# Altium PCB mppt-ng controlboard.PCBDOC
Units mm, origin at the board's own origin, x right, y up, seen from the top; angles counter-clockwise.
Board outline 53.45 x 100.2 mm, 2 copper layers (Top Layer, Bottom Layer); 131 components, 123 nets, 548 pads, 104 vias.
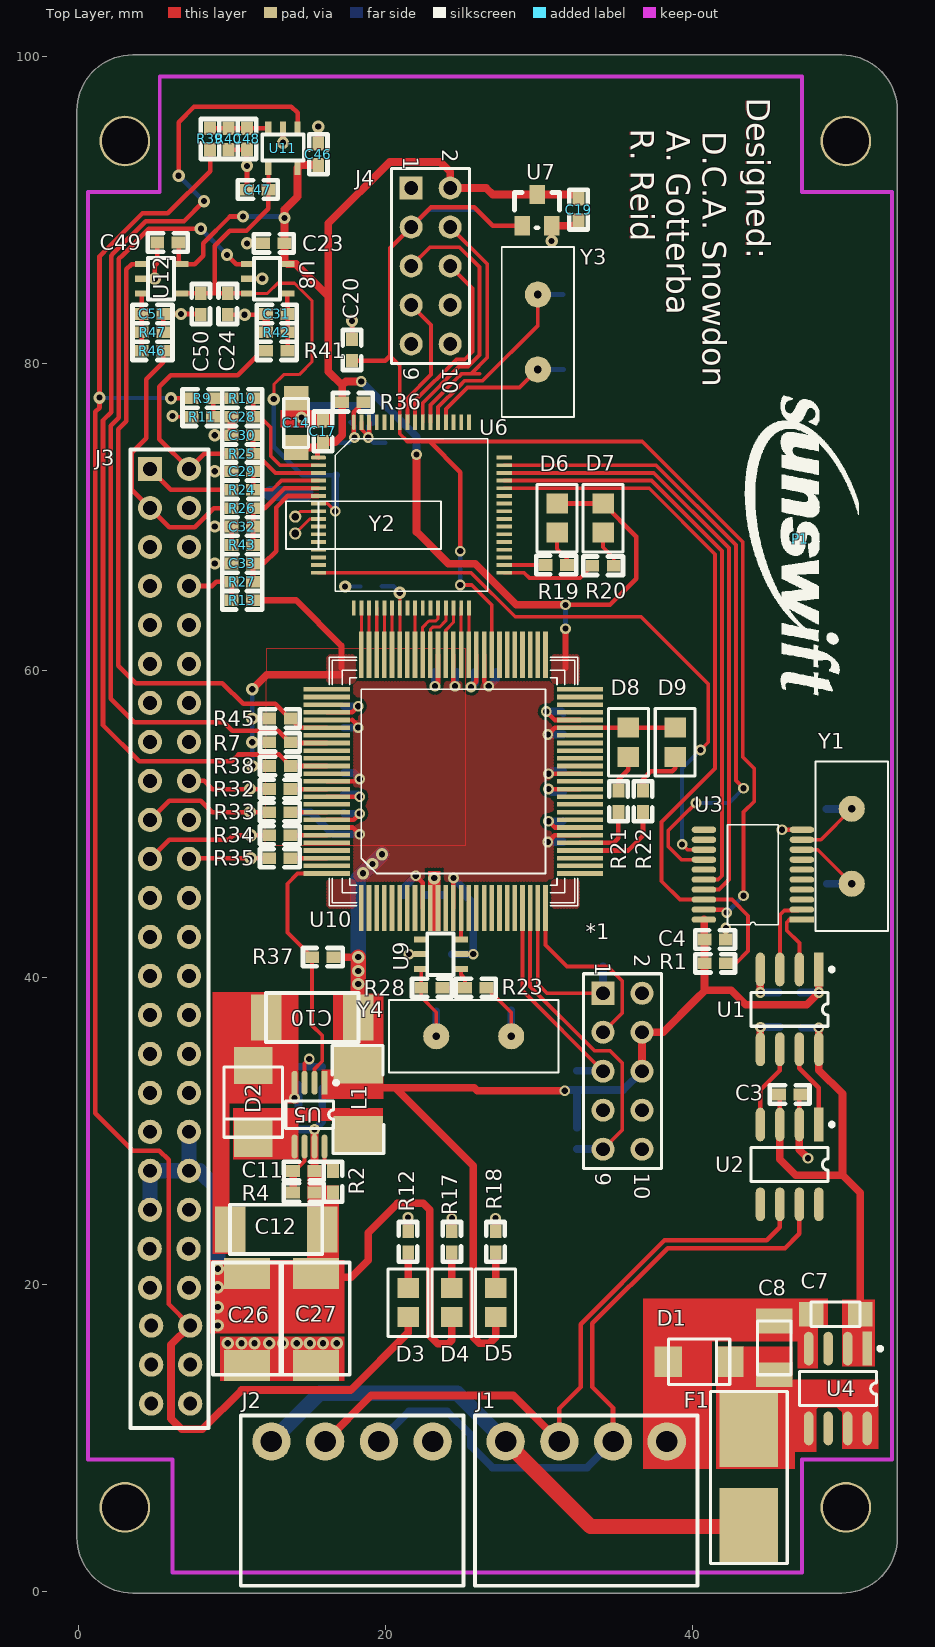
[diagram p0: Top Layer view]
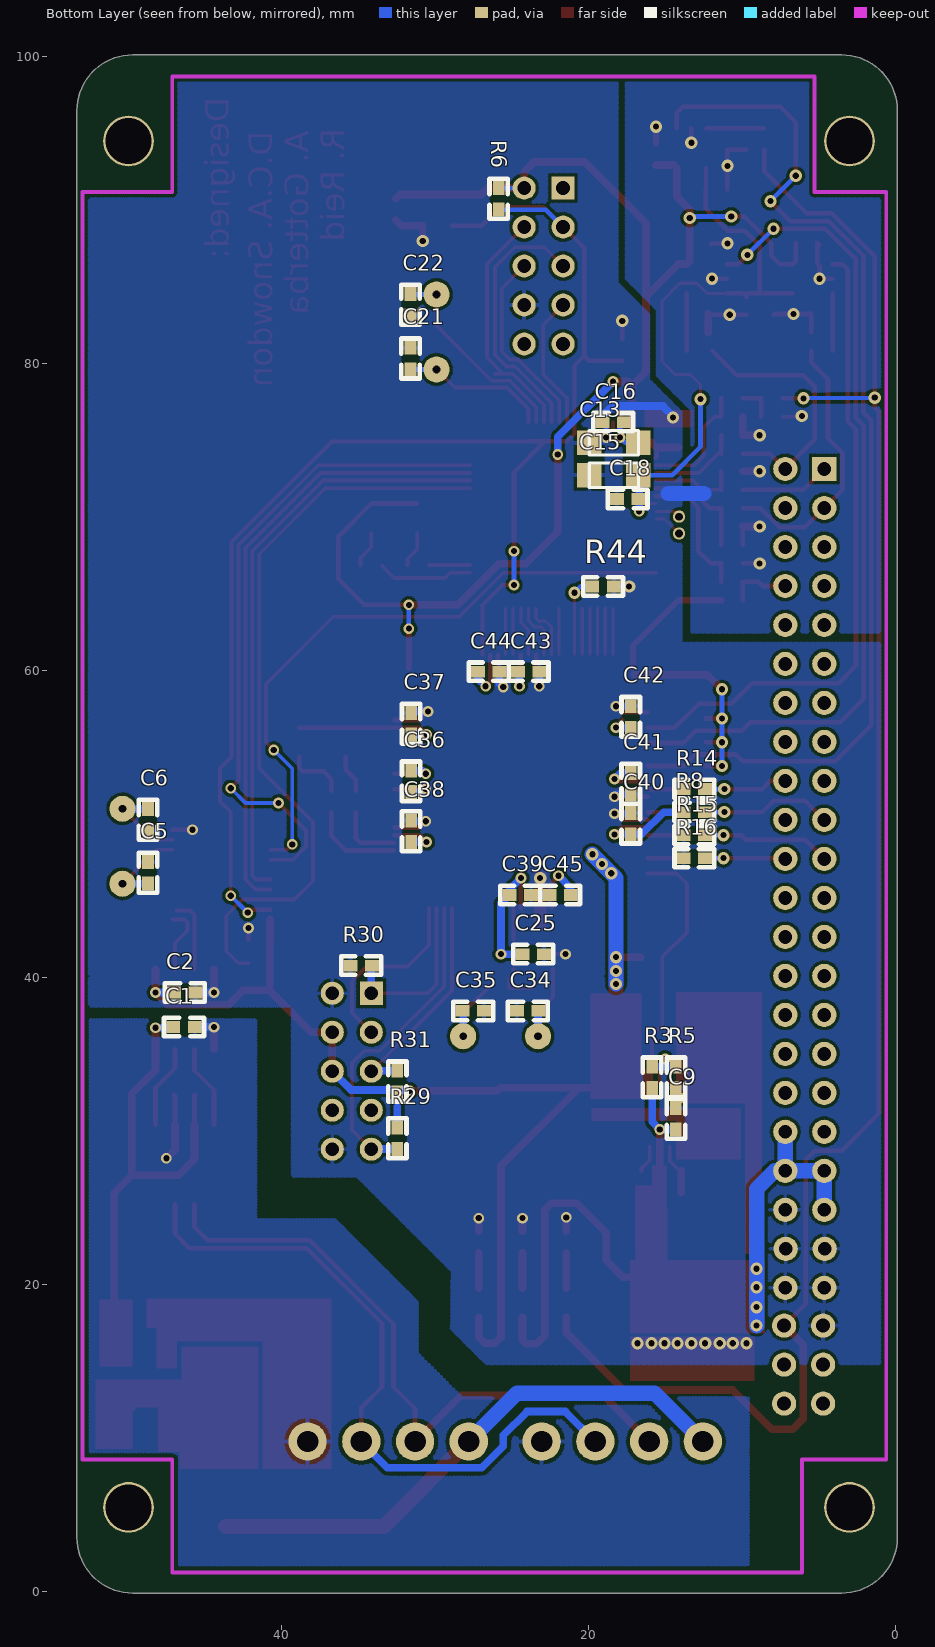
[diagram p1: Bottom Layer view, seen from below]

## Layer stack, top to bottom
Top Layer: signal copper 0.0356
Dielectric: dielectric 0.32, FR-4, Dk 4.8
Bottom Layer: signal copper 0.0356

## Board outline
3.5,-0.077 cw(c3.5,3.55) -0.127,3.55 -0.127,96.5 cw(c3.5,96.5) 3.5,100.127 49.7,100.127 cw(c49.7,96.5) 53.327,96.5 53.327,3.55 cw(c49.7,3.55) 49.7,-0.077

## Design rules (kind name [scope] priority, off if disabled: settings)
Clearance [All] p1: gap=0.2
ComponentClearance [All] p1: gap=0.254 collisioncheckmode=0
HoleSize [All] p1: absolutevalues=TRUE maxlimit=10 minlimit=0.3 maxpercent=80.000 minpercent=20.000
MinimumAnnularRing [All] p1: minimumring=0.15
PlaneClearance [All] p1: clearance=0.5
PlaneConnect [All] p1: planeconnectstyle=Relief reliefexpansion=0.5 reliefentries=4 reliefconductorwidth=0.25 reliefairgap=0.25
PolygonConnect [All] p1: connectstyle=Relief reliefconductorwidth=0.25 reliefentries=4 polygonreliefangle="90 Angle"
RoomDefinition U_3V3-CAN [InComponentClass('U_3V3-CAN')] p1: confinementstyle=ConfineIn formatcopy=TRUE outline 10.169,0.019 10.169,11.881 37.144,11.881 37.144,16.829 39.564,16.829 39.564,50.279 47.683,50.279 47.683,54.418 53.018,54.418 53.018,42.733 52.709,42.733 52.709,9.194 46.514,9.194 46.514,1.409 40.681,1.409 40.681,0.019
RoomDefinition U_MAXII [InComponentClass('U_MAXII')] p2: confinementstyle=ConfineIn formatcopy=TRUE outline 14.294,42.694 14.294,62.906 34.506,62.906 34.506,41.997 38.314,41.997 38.314,25.359 32.526,25.359 32.526,27.844 31.444,27.844 31.444,42.694
RoomDefinition U_3V3SwitchingRegulator [InComponentClass('U_3V3SwitchingRegulator')] p3: confinementstyle=ConfineIn formatcopy=TRUE outline 10.85,39.4 19.561,39.4 19.561,35.944 20.22,35.944 20.22,28.193 17.562,28.193 17.562,25.013 17.211,25.013 17.211,21.638 8.5,21.638 8.5,25.6 9.102,25.6 9.102,35.86 10.85,35.86
RoutingCorners [All] p1: cornerstyle=45-Degree minsetback=3 maxsetback=3
RoutingLayers [All] p1: top layer="Not Used" bottom layer="Not Used"
RoutingVias [All] p1: holewidth=0.4 width=0.8 viastyle="Through Hole" minholewidth=0.4 minwidth=0.7 maxholewidth=8 maxwidth=10
SolderMaskExpansion [All] p1: expansion=0.102
TestPointUsage [All] p1: valid=0 allowmultiple=FALSE
Testpoint [All] p1: side=15 testpointundercomponent=TRUE minsize=1.016 maxsize=2.54 preferedsize=1.524 minholesize=0 maxholesize=1.016 preferedholesize=0.813 testpointgrid=0.025 style=1023 order=-539222988
Width [All] p1: maxlimit=5 minlimit=0.2 preferedwidth=0.254 toplayer_prefwidth=0.4 bottomlayer_prefwidth=1 minimp=50.000000 maximp=50.000000 favimp=50.000000
12 further rules are at their usual default settings.

## Classes and differential pairs
component class TopLevel: C23 C24 C25 C26 C27 C28 C29 C30 C31 C32 C33 C34 C35 C46 C47 C48 C49 C50 C51 D3 D4 D5 D6 D7 D8 D9 J3 J7 P1 R7 R8 R9 R10 R11 R12 R13 R14 R15 R16 R17 R18 R19 R20 R21 R22 R23 R24 R25 R26 R27 R28 R32 R33 R34 R35 R37 R38 R39 R40 R41 R42 R43 R44 R45 R46 R47 U8 U9 U11 U12 Y4
component class MSP430F149: C13 C14 C15 C16 C17 C18 C19 C20 C21 C22 J4 J6 R6 R36 U6 U7 Y2 Y3
component class U_3V3-CAN: C1 C2 C3 C4 C5 C6 C7 C8 D1 F1 J1 J2 R1 U1 U2 U3 U4 Y1
component class U_3V3SwitchingRegulator: C9 C10 C11 C12 D2 L1 R2 R3 R4 R5 U5
component class U_MAXII: *1 C36 C37 C38 C39 C40 C41 C42 C43 C44 C45 R29 R30 R31 U10

## Components (designator, comment, footprint, x,y, rotation, side; value= is the part's Value field where it differs from the comment)
*1 "JTAGHEADER" HDR2X5 34.15,39 r270 top
C1 "100n" 0603 45.65,36.8 r0 bottom
C2 "100n" 0603 45.6,39.05 r0 bottom
C3 "100n" 0603 47,32.4 r180 top
C4 "100n" 0603 40.75,42.5 r0 top
C5 "27p" 0603 48.7,47.55 r270 bottom
C6 "27p" 0603 48.7,49.6 r90 bottom
C7 "2.2u" MCCT-CASEA 49.3,18.1 r0 top
C8 "10u" MCCT-CASEB 45.3,14.15 r90 top
C9 "100n" 0603 14.306,30.119 r90 bottom
C10 "22u 6.3V" MCCT-CASEC 18.206,37.419 r180 top
C11 "1n" 0603 15.356,27.419 r180 top
C12 "22u 16V" MCCT-CASEC 15.856,23.619 r180 top
C13 "CAP POL3" MCCT-CASEA 18.35,74.85 r0 bottom
C14 "CAP POL3" MCCT-CASEA 14.15,76.15 r90 top
C15 "CAP POL3" MCCT-CASEA 18.35,72.75 r0 bottom
C16 "100nF" 0603 17.7,76.2 r0 bottom
C17 "100nF" 0603 15.9,74.9 r90 top
C18 "100nF" 0603 16.75,71.2 r0 bottom
C19 "100nF" 0603 32.55,90.75 r270 top
C20 "10nF" 0603 17.8,80.2 r90 top
C21 "18pF" 0603 31.6,79.65 r90 bottom
C22 "18pF" 0603 31.6,84.55 r270 bottom
C23 "100n" 0603 13.4,87.85 r180 top
C24 "100n" 0603 9.7,84.6 r270 top
C25 "100n" 0603 24.3,41.55 r180 bottom
C26 "CAP POL3" MCCT-CASED 10.95,20.75 r270 top
C27 "CAP POL3" MCCT-CASED 15.45,20.75 r270 top
C28 "1n5" 0603 9.95,76.55 r0 top
C29 "" 0603 9.95,73 r0 top
C30 "" 0603 9.95,75.35 r0 top
C31 "1n" 0603 13.6,83.25 r180 top
C32 "10n" 0603 9.95,69.4 r0 top
C33 "10n" 0603 9.95,67 r0 top
C34 "30pF" 0603 23.25,37.85 r0 bottom
C35 "30pF" 0603 28.2,37.85 r180 bottom
C36 "100nF" 0603 31.55,53.5 r270 bottom
C37 "100nF" 0603 31.55,55.85 r90 bottom
C38 "100nF" 0603 31.55,48.85 r90 bottom
C39 "100nF" 0603 25.15,45.4 r180 bottom
C40 "100nF" 0603 17.25,49.35 r90 bottom
C41 "100nF" 0603 17.25,53.35 r270 bottom
C42 "100nF" 0603 17.25,56.3 r90 bottom
C43 "100nF" 0603 24.6,59.95 r180 bottom
C44 "100nF" 0603 27.2,59.95 r180 bottom
C45 "100nF" 0603 21.15,45.4 r0 bottom
C46 "100n" 0603 15.6,92.95 r90 top
C47 "100n" 0603 12.35,91.35 r180 top
C48 "?nF" 0603 10.95,95.35 r270 top
C49 "100n" 0603 6.5,87.9 r180 top
C50 "100n" 0603 7.95,84.6 r270 top
C51 "?nF" 0603 4.1,83.25 r0 top
D1 "5V Transient Supressor" SMA 40.4,15 r0 top
D2 "MBRS130" SMB 11.356,31.919 r270 top
D3 "LED" 0805LED 21.45,17.9 r90 top
D4 "LED" 0805LED 24.3,17.9 r90 top
D5 "LED" 0805LED 27.15,17.9 r90 top
D6 "LED" 0805LED 31.15,70.9 r270 top
D7 "LED" 0805LED 34.15,70.9 r270 top
D8 "LED" 0805LED 35.8,56.3 r270 top
D9 "LED" 0805LED 38.85,56.3 r270 top
F1 "125mA/3A" LITTELFUSE-154 43.65,7.45 r90 top
J1 "CON4" WEIDMULLER-SL3.5/4/90G 27.8,9.8 r0 top
J2 "CON4" WEIDMULLER-SL3.5/4/90G 12.55,9.8 r0 top
J3 "MPPT_NG" BL12/50M 4.64,73.152 r0 top
J4 "Tritium JTAG Connector" HDR2X5 21.65,91.45 r270 top
L1 "330u" 1812 18.206,29.819 r90 top
P1 "SUN_LOGO" SUNSWIFTLOGO 47,68.6 r270 top
R1 "10k" 0603 42.15,40.95 r180 top
R2 "100k" 0603 16.556,27.419 r270 top
R3 "120k" 0603 15.856,32.819 r90 bottom
R4 "1R 1%" 0603 15.356,26.019 r180 top
R5 "47k" 0603 14.306,32.819 r90 bottom
R6 "10k" 0603 25.85,90.05 r90 bottom
R7 "10k" 0603 13.8,55.35 r180 top
R8 "10k" 0603 12.4,50.8 r0 bottom
R9 "1M5 1%" 0603 8.75,77.75 r180 top
R10 "22k" 0603 11.35,77.75 r180 top
R11 "220k 1%" 0603 7.35,76.55 r0 top
R12 "3k3" 0603 21.45,23.5 r270 top
R13 "3k3" 0603 9.95,64.6 r0 top
R14 "3k3" 0603 13.797,52.3 r180 bottom
R15 "3k3" 0603 13.797,49.3 r180 bottom
R16 "3k3" 0603 13.797,47.8 r180 bottom
R17 "1k0" 0603 24.3,23.5 r270 top
R18 "1k0" 0603 27.15,23.5 r270 top
R19 "1k0" 0603 30.4,66.9 r0 top
R20 "1k0" 0603 33.45,66.85 r0 top
R21 "1k0" 0603 35.15,50.8 r90 top
R22 "1k0" 0603 36.75,50.8 r90 top
R23 "1k0" 0603 26.55,39.35 r180 top
R24 "8k2" 0603 11.35,71.8 r180 top
R25 "4k7" 0603 9.95,74.15 r0 top
R26 "33k" 0603 11.35,70.6 r180 top
R27 "33k" 0603 11.35,65.8 r180 top
R28 "2,2M" 0603 23.7,39.35 r180 top
R29 "10k" 0603 32.45,28.85 r90 bottom
R30 "10k" 0603 35.5,40.8 r180 bottom
R31 "10k" 0603 32.45,33.95 r270 bottom
R32 "100R" 0603 12.4,52.3 r0 top
R33 "100R" 0603 12.4,50.8 r0 top
R34 "100R" 0603 12.4,49.3 r0 top
R35 "100R" 0603 12.4,47.8 r0 top
R36 "100R" 0603 18.55,77.5 r180 top
R37 "10k" 0603 15.2,41.35 r0 top
R38 "10k" 0603 13.8,53.8 r180 top
R39 "1M 1%" 0603 8.55,95.35 r270 top
R40 "330k 1%" 0603 9.75,93.95 r90 top
R41 "10k" 0603 12.2,80.85 r0 top
R42 "150k" 0603 12.2,82.05 r0 top
R43 "33k" 0603 11.35,68.2 r180 top
R44 "10k" 0603 19.75,65.5 r180 bottom
R45 "10k" 0603 13.8,56.9 r180 top
R46 "" 0603 4.1,80.85 r0 top
R47 "" 0603 5.5,82.05 r180 top
U1 "IL712" SO8 46.3,37.95 r180 top
U2 "SN65HVD232" SO8 46.3,27.85 r180 top
U3 "MCP2515X/ST" TSSOP20 47.1,43.8 r180 top
U4 "MIC5200" SO8 49.45,13.25 r180 top
U5 "LTC1474" TSOP8 16.006,33.169 r270 top
U6 "MSP430F149" QFP64 15.6,73.9 r0 top
U7 "XC61CN2702MR" SOT23-3 28.894,88.999 r0 top
U8 "LMV7235M5" SOT23-5 11,86.501 r270 top
U9 "SN74LVC1GX04" SOT23-6 22.3,42.5 r270 top
U10 "EPM570T100C4" TQFP100 18.4,45.05 r90 top
U11 "LMV7235M5" SOT23-5 14.25,95.35 r180 top
U12 "LMV7235M5" SOT23-5 4.1,86.5 r270 top
Y1 "16MHz" HC49/4H 50.35,43.05 r90 top
Y2 "32.768 KHz" WATCHA 14.1,70.05 r270 top
Y3 "7.3728 MHz" HC49/4H 29.9,87.6 r270 top
Y4 ">40 MHz" HC49/4H 31.25,36.2 r180 top

## Footprints (in the part's own frame and the unit in brackets; to place one, negate y for a bottom-side part, rotate by r counter-clockwise, add the part's x,y. Pads: shape width x height; smd on the part's side, far side on the other; paste and mask are expansions set on the pad)
0603 [mil]
  rect 35.43x30 smd: 1(0,0) 2(55,0)
  silkscreen extent -24,-24 79,24
0805LED [mm]
  rect 1.3x1.4 smd: A(0,0) K(1.9,0)
  silkscreen extent -1.25,-1.3 3.15,1.3
1812 [mm]
  rect 2.4x3.2 smd: 1(0,0) 2(4.5,0)
  silkscreen extent -1.27,-1.66 5.77,1.7
BL12/50M [mil]
  rect 62x62 hole 35.43: 1(0,0)
  round 62 hole 35.43: 2(100,0) 3(0,-100) 4(100,-100) 5(0,-200) 6(100,-200) 7(0,-300) 8(100,-300) 9(0,-400) 10(100,-400) 11(0,-500) 12(100,-500) 13(0,-600) 14(100,-600) 15(0,-700) 16(100,-700) 17(0,-800) 18(100,-800) 19(0,-900) 20(100,-900) 21(0,-1000) 22(100,-1000) 23(0,-1100) 24(100,-1100) 25(0,-1200) 26(100,-1200) 27(0,-1300) 28(100,-1300) 29(0,-1400) 30(100,-1400) 31(0,-1500) 32(100,-1500) 33(0,-1600) 34(100,-1600) 35(0,-1700) 36(100,-1700) 37(0,-1800) 38(100,-1800) 39(0,-1900) 40(100,-1900) 41(-1,-2000) 42(99,-2000) 43(0,-2100) 44(100,-2100) 45(3,-2197) 46(103,-2197) 47(3,-2297) 48(103,-2297) 49(3,-2397) 50(103,-2397)
  silkscreen extent -50,-2460 150,50
HC49/4H [mm]
  round 1.7 hole 0.5: 1(3.085,0) 2(7.965,0)
  silkscreen extent 0,-2.35 11.05,2.35
HDR2X5 [mm] "Connector; Header; 5x2 Position"
  rect 1.5x1.5 hole 0.9: 1(0,0)
  round 1.5 hole 0.9: 2(0,2.54) 3(2.54,0) 4(2.54,2.54) 5(5.08,0) 6(5.08,2.54) 7(7.62,0) 8(7.62,2.54) 9(10.16,0) 10(10.16,2.54)
  silkscreen extent -1.27,-1.27 11.43,3.81
LITTELFUSE-154 [mm]
  rect 5x3.81 smd: 1(-3.185,0) 2(3.185,0)
  silkscreen extent -5.6,-2.51 5.6,2.5
MCCT-CASEA [mm]
  rect 1.6x1.6 smd: 1(-1.6,0) 2(1.6,0)
  silkscreen extent -1.6,-0.8 1.6,0.8
MCCT-CASEB [mm]
  rect 1.6x2.4 smd: 1(0,0) 2(3.5,0)
  silkscreen extent 0,-1.1 3.5,1.1
MCCT-CASEC [mm]
  rect 2x3 smd: 1(0,0) 2(6,0)
  silkscreen extent 0,-1.6 6,1.6
MCCT-CASED [mm]
  rect 2x3 smd: 1(0,0) 2(6,0)
  silkscreen extent -0.7,-2.2 6.6,2.2
QFP64 [mm]
  oval 1x0.25 smd: 1(0.008,-0.005)
  rect 1x0.25 smd: 2(0.008,-0.505) 3(0.008,-1.005) 4(0.008,-1.505) 5(0.008,-2.005) 6(0.008,-2.505) 7(0.008,-3.005) 8(0.008,-3.505) 9(0.008,-4.005) 10(0.008,-4.505) 11(0.008,-5.005) 12(0.008,-5.505) 13(0.008,-6.005) 14(0.008,-6.505) 15(0.008,-7.005) 16(0.008,-7.505) 33(12.108,-7.505) 34(12.108,-7.005) 35(12.108,-6.505) 36(12.108,-6.005) 37(12.108,-5.505) 38(12.108,-5.005) 39(12.108,-4.505) 40(12.108,-4.005) 41(12.108,-3.505) 42(12.108,-3.005) 43(12.108,-2.505) 44(12.108,-2.005) 45(12.108,-1.505) 46(12.108,-1.005) 47(12.108,-0.505) 48(12.108,-0.005)
  rect 0.25x1 smd: 17(2.308,-9.805) 18(2.808,-9.805) 19(3.308,-9.805) 20(3.808,-9.805) 21(4.308,-9.805) 22(4.808,-9.805) 23(5.308,-9.805) 24(5.808,-9.805) 25(6.308,-9.805) 26(6.808,-9.805) 27(7.308,-9.805) 28(7.808,-9.805) 29(8.308,-9.805) 30(8.808,-9.805) 31(9.308,-9.805) 32(9.808,-9.805) 49(9.808,2.295) 50(9.308,2.295) 51(8.808,2.295) 52(8.308,2.295) 53(7.808,2.295) 54(7.308,2.295) 55(6.808,2.295) 56(6.308,2.295) 57(5.808,2.295) 58(5.308,2.295) 59(4.808,2.295) 60(4.308,2.295) 61(3.808,2.295) 62(3.308,2.295) 63(2.808,2.295)
  oval 0.25x1 smd: 64(2.308,2.295)
  silkscreen extent 1.09,-8.72 11.02,1.21
SMA [mm]
  rect 1.8x2 smd: A(-2,0) K(2,0)
  silkscreen extent -2,-1.48 2,1.48
SMB [mm]
  rect 2.4x2.5 smd: A(-2.385,0) K(2.385,0)
  silkscreen extent -2.28,-1.9 2.3,1.9
SO8 [mm]
  rect 0.6x2.2 smd: 1(-1.905,-2.6)
  oval 0.6x2.2 smd: 2(-0.635,-2.6) 3(0.635,-2.6) 4(1.905,-2.6) 5(1.905,2.6) 6(0.635,2.6) 7(-0.635,2.6) 8(-1.905,2.6)
  silkscreen extent -2.88,-2.72 2.5,1.1
SOT23-3 [mm]
  rect 1x1.25 smd: 1(0,0) 2(1.905,0) 3(0.965,2.032)
  silkscreen extent -0.51,-0.13 2.41,2.16
SOT23-5 [mm]
  rect 0.4x0.9 smd: 1(0,0) 2(0.953,0) 3(1.91,0) 4(1.91,2.59) 5(0,2.59)
  silkscreen extent -0.4,0.4 2.3,2.1
SOT23-6 [mm]
  rect 0.4x0.9 smd: 1(0,0) 2(0.953,0) 3(1.91,0) 4(1.91,2.59) 5(0.953,2.59) 6(0,2.59)
  silkscreen extent -0.4,0.4 2.3,2.1
SUNSWIFTLOGO [mm] "Sunswift Logo"
  silkscreen extent -9.32,-3.58 10.19,3.81
TQFP100 [mm]
  rect 3x0.3 smd: 1(-0.5,0) 2(-0.5,-0.5) 3(-0.5,-1) 4(-0.5,-1.5) 5(-0.5,-2) 6(-0.5,-2.5) 7(-0.5,-3) 8(-0.5,-3.5) 9(-0.5,-4) 10(-0.5,-4.5) 11(-0.5,-5) 12(-0.5,-5.5) 13(-0.5,-6) 14(-0.5,-6.5) 15(-0.5,-7) 16(-0.5,-7.5) 17(-0.5,-8) 18(-0.5,-8.5) 19(-0.5,-9) 20(-0.5,-9.5) 21(-0.5,-10) 22(-0.5,-10.5) 23(-0.5,-11) 24(-0.5,-11.5) 25(-0.5,-12) 51(16,-12) 52(16,-11.5) 53(16,-11) 54(16,-10.5) 55(16,-10) 56(16,-9.5) 57(16,-9) 58(16,-8.5) 59(16,-8) 60(16,-7.5) 61(16,-7) 62(16,-6.5) 63(16,-6) 64(16,-5.5) 65(16,-5) 66(16,-4.5) 67(16,-4) 68(16,-3.5) 69(16,-3) 70(16,-2.5) 71(16,-2) 72(16,-1.5) 73(16,-1) 74(16,-0.5) 75(16,0)
  rect 0.3x3 smd: 26(1.75,-14.25) 27(2.25,-14.25) 28(2.75,-14.25) 29(3.25,-14.25) 30(3.75,-14.25) 31(4.25,-14.25) 32(4.75,-14.25) 33(5.25,-14.25) 34(5.75,-14.25) 35(6.25,-14.25) 36(6.75,-14.25) 37(7.25,-14.25) 38(7.75,-14.25) 39(8.25,-14.25) 40(8.75,-14.25) 41(9.25,-14.25) 42(9.75,-14.25) 43(10.25,-14.25) 44(10.75,-14.25) 45(11.25,-14.25) 46(11.75,-14.25) 47(12.25,-14.25) 48(12.75,-14.25) 49(13.25,-14.25) 50(13.75,-14.25) 76(13.75,2.25) 77(13.25,2.25) 78(12.75,2.25) 79(12.25,2.25) 80(11.75,2.25) 81(11.25,2.25) 82(10.75,2.25) 83(10.25,2.25) 84(9.75,2.25) 85(9.25,2.25) 86(8.75,2.25) 87(8.25,2.25) 88(7.75,2.25) 89(7.25,2.25) 90(6.75,2.25) 91(6.25,2.25) 92(5.75,2.25) 93(5.25,2.25) 94(4.75,2.25) 95(4.25,2.25) 96(3.75,2.25) 97(3.25,2.25) 98(2.75,2.25) 99(2.25,2.25) 100(1.75,2.25)
  silkscreen extent -0.35,-14.1 15.85,2.1
TSOP8 [mm]
  rect 1.55x0.4 smd: 1(0,0)
  oval 1.55x0.4 smd: 2(0,-0.65) 3(0,-1.3) 4(0,-1.95) 5(4.15,-1.95) 6(4.15,-1.3) 7(4.15,-0.65) 8(4.15,0)
  silkscreen extent -0.12,-2.52 2.98,0.88
TSSOP20 [mm]
  rect 1.6x0.4 smd: 1(0,0)
  oval 1.6x0.4 smd: 2(0,-0.65) 3(0,-1.3) 4(0,-1.95) 5(0,-2.6) 6(0,-3.25) 7(0,-3.9) 8(0,-4.55) 9(0,-5.2) 10(0,-5.85) 11(6.38,-5.85) 12(6.38,-5.2) 13(6.38,-4.55) 14(6.38,-3.9) 15(6.38,-3.25) 16(6.38,-2.6) 17(6.38,-1.95) 18(6.38,-1.3) 19(6.38,-0.65) 20(6.38,0)
  silkscreen extent 1.53,-6.18 4.85,0.33
WATCHA [mm]
  round 0.8 hole 0.5: 1(0,0) 2(1.1,0)
  silkscreen extent -1,-0.6 2.1,9.5
WEIDMULLER-SL3.5/4/90G [mm]
  round 2.5 hole 1.4: 1(0,0) 2(3.5,0) 3(7,0) 4(10.5,0)
  silkscreen extent -2,-9.4 12.5,1.7

## Part data
C1 C2 C3 C4 C5 C6 C7 C8 C9 C11 C16 C17 C18 C19 C20 C21 C22 C23 C24 C25 C28 C29 C30 C31 C32 C33 C34 C35 C36 C37 C38 C39 C40 C41 C42 C43 C44 C45 C46 C47 C48 C49 C50 C51: library part CAP, "Capacitor"
C10 C12: library part "Cap Pol3", "Polarized Capacitor (Surface Mount)"
C13 C14 C15 C26 C27: "Polarized Capacitor (Surface Mount)"
D1: library part DIODE, "Diode"
D2: library part "D SCHOTTKY", "Schottky Diode"
F1: library part FUSE2, "Fuse"
J1 J2: "Connector"
J3: "Biel Control Board Interconnector"
J4: library part 430F_JTAG_TRITIUM, "Tritium JTAG interface for MSP430"
L1: library part Inductor, "Inductor"
R1: library part RES1
R2 R4 R5 R6 R7 R8 R10 R11 R12 R13 R14 R15 R16 R17 R18 R19 R20 R21 R22 R23 R24 R25 R26 R27 R28 R29 R30 R31 R32 R33 R34 R35 R36 R37 R38 R40 R41 R42 R43 R44 R45 R47: library part RES1, "Resistor"
R3 R9 R39 R46: library part Res1, "Resistor"
U1: "IL712 Optoisolator - www.nve.com"
U2: "3.3V CAN Transciever"
U3: "MCP2510 CAN Controller"
U4: "MIC5200 - SO8"
U5: "Step-down converter, LTC1474CMS8-3.3"
U6: library part MSP430F14X
U7: library part XC61F, "SOT23 reset generator"
U8 U11 U12: library part LMV7235, "Low Power Comparator, Open-Drain Output"
U9: "Crystal oscillator driver"
U10: "MAX II 2.5/3.3V FPGA, 76 I/Os, 100-Pin Plastic TQFP, Commercial Temperature, Speed Grade 4"
Y1 Y2 Y3 Y4: library part CRYSTAL, "Crystal"

## Free pads (board coordinates)
  round 3.3 hole 3: 0(2.997,94.513) 1(2.997,5.512) 2(49.962,5.512) 3(49.962,94.513)

## Via types
v1: diameter 0.8, hole 0.4, Top Layer to Bottom Layer, 55 vias
v2: diameter 0.7, hole 0.4, Top Layer to Bottom Layer, 49 vias

## Nets (pads, with @x,y where several pads share a name; then routed paths per layer and width w, separated by ;. In a path a pad name is that pad's centre, name@x,y a point inside that pad or via, vN(x,y) a via of type N, cw(c..) or ccw(c..) an arc to the next point about the centre after c; other vN are vias at no path point)
3V3: *1.4 *1.6 C2.2 C4.1 C10.1 C14.1 C17.1 C19.1 C23.1 C25.1 C36.1 C37.1 C38.1 C39.1 C40.1 C41.1 C42.1 C43.1 C44.1 C45.1 C46.1 C49.1 D5.A D6.A D7.A D8.A D9.A J4.2 L1.2 R1.2 R6.2 R7.2 R8.2 R13.2 R29.2 R31.2 R36.2 R37.2 R38.2 R45.2 U1.1 U3.20 U5.1 U6.1 U7.3 U8.5 U9.5 U10.9 U10.13 U10.31 U10.39 U10.45 U10.59 U10.63 U10.80 U10.88 U10.94 U11.5 U12.5 | length 255.6
  Top Layer w0.25: J4.2 J4.2@24.193,91.45 ; U9.5 v2(25.697,41.547)
  Top Layer w0.3: C49.1 6.5,86.69 U12.5 7.55,86.5 8.1,87.05 8.1,87.85 9.85,89.6 v1(10.7,89.6) ; v1(11.3,53.8) R38.2 ; v1(11.3,55.35) R7.2@12.353,55.35 ; v1(11.3,56.9) R45.2@12.353,56.9 ; R13.2@11.3,64.553 R13.2 ; v1@13.4,89.3 v1(13.4,89.5) ; C17.1@15.55,74.55 15.55,73.953 U6.1 ; U10.94 17.85,49.8 v2(18.3,49.35) ; U10.88 18.3,52.8 v2(18.3,52.95) ; 17.8,56.8 18.2,56.4 v2(18.2,56.3) ; v2(21.95,46.65) 22.4,46.2 U10.9 ; U10.13 v2(24.4,46.5) ; U10.63 24.4,59.1 v2(24.5,59) ; U10.59 26.4,59.3 v2(26.7,59) ; v2(30.55,48.85) 31,49.3 U10.31 ; v2@30.55,53.3 U10.39 ; v2(30.55,55.85) 31,56.3 U10.45 D9.A ; D6.A D7.A 36.3,68.75 36.3,66 34.6,64.3 v2(31.7,64.3)
  Top Layer w0.4: R13.2 14.15,64.6 17.1,61.65 17.1,60.2 ; 31.7,60.2 v2(31.7,62.75)
  Top Layer w0.5: v1(11.3,58.8) 12.25,59.75 17,59.75 ; v1@13.4,89.3 13.4,86.69 U8.5 14.149,86.501 16.25,84.4 ; v1(13.4,89.5) 13.4,90.05 14.25,90.9 U11.5 14.44,92.95 C46.1 ; C14.1 15.55,74.55 C17.1 16.7,74.9 17.153,75.353 17.153,78.6 ; R37.2 v1(18.206,41.35) ; 18.2,32.85 25.75,32.85 25.95,32.65 v2(31.65,32.65) ; v2(18.4,78.85) 17.403,78.85 17.153,78.6 ; 20.6,32.85 25.7,27.75 25.7,16.6 26.1,16.2 26.75,16.2 27.15,16.6 D5.A ; v2(22,74.1) 22,69.05 24.08,66.97 25.83,66.97 28.5,64.3 v2(31.7,64.3) ; C19.1 32.269,91.031 26.969,91.031 26.55,91.45 J4.2 24.19,92.51 23.55,93.15 20.25,93.15 16.25,89.15 16.25,79.503 17.153,78.6 ; *1.6 *1.4 38.06,36.46 40.193,38.593 40.8,39.2 42.5,39.2 43.45,38.25 47.41,38.25 v2(48.205,39.045) ; U3.20 40.75,43.77 C4.1 40.753,42.497 R1.2 40.753,39.2 ; v2@48.205,38.995 U1.1
  Top Layer w1: C10.1 v1(18.206,41.35)
  Bottom Layer w0.3: v1(10.7,89.6) 13.3,89.6 v1(13.4,89.5) ; v1(11.3,53.8) v1(11.3,58.8) ; J4.2@24.193,91.45 R6.2@25.847,91.45 ; v2(31.7,62.75) v2(31.7,64.3)
  Bottom Layer w0.5: R8.2 15.1,50.8 16.55,49.35 C40.1 v2(18.3,49.35) ; C41.1 17.9,53.35 v2(18.3,52.95) ; C42.1 v2(18.2,56.3) ; v2(18.4,78.85) 22,75.25 v2(22,74.1) ; C45.1 21.15,45.85 v2(21.95,46.65) ; C25.1 25.694,41.55 v2(25.697,41.547) 25.697,44.853 C39.1 25.15,45.75 v2(24.4,46.5) ; v2(24.5,59) 24.5,59.85 C43.1 ; v2(26.7,59) 27.2,59.5 C44.1 ; v2(30.55,48.85) C38.1 ; v2(30.55,55.85) C37.1 ; v2(30.6,53.3) 30.8,53.5 C36.1 ; v2@31.7,32.7 35.47,32.7 *1.6 ; R29.2 R31.2 R31.2@32.597,32.7 ; C2.2@47.002,39.045 v2(48.205,39.045)
  Bottom Layer w1: v1(18.206,39.6) 18.206,46.506 v1(18.518,46.818) v1(19.12,47.42) v1(19.75,48.05)
  other v1: 18.206,40.45
5V: C9.1 C11.1 C12.1 C26.1 C27.1 D4.A J3.36 J3.37 J3.38 J3.39 R2.2 R3.1 R4.1 U5.7 | length 49.1
  Top Layer w0.5: C27.1@15.35,20.5 17.75,20.5 18.85,21.6 18.85,23.4 20.764,25.314 22.436,25.314 22.85,24.9 22.85,16.7 23.378,16.172 24.072,16.172 24.3,16.4 D4.A ; R4.1 v2(15.356,30.119)
  Bottom Layer w0.5: C9.1 v2(15.356,30.119) 15.856,30.619 R3.1
  Bottom Layer w1: J3.39 J3.37 7.868,27.432 9.05,26.25 v1(9.05,17.35) ; J3.38 J3.36
  other v1: 9.05,18.55 9.05,19.85 9.05,21.05
15V: D3.A J3.46 R9.2 R39.2 | length 116
  Top Layer w0.3: v1(6,77.75) R9.2 ; J3.46 5.85,18.754 5.85,28.15 5.25,28.75 3.5,28.75 1.077,31.173 1.077,76.877 1.35,77.15 1.35,87 1.961,87.611 4.15,89.8 5.8,89.8 8.55,92.55 R39.2
  Top Layer w0.5: J3.46 6,16.092 6,11.3 6.7,10.6 8.05,10.6 10.6,13.15 17.7,13.15 21.45,16.9 D3.A
  Bottom Layer w0.3: v1@1.5,77.8 v1(6,77.75)
  other v1: 1.35,77.8
15V_MEAS: C28.2 R10.1 U6.2 | length 7.8
  Top Layer w0.25: C28.2 11.8,76.55 12.5,75.85 12.5,74 13.105,73.395 U6.2
  Top Layer w0.3: C28.2@11.35,76.553 R10.1
232RX: J3.27
232TX: J3.26
/REG_FS: R37.1 U5.2 U10.100 | length 17
  Top Layer w0.25: U5.2 15.356,34.069 15.856,34.569 15.856,36.25 15.2,36.906 R37.1 13.583,42.967 13.583,46.133 14.25,46.8 U10.100
/RESET: C20.1 J4.3 R6.1 U3.19 U6.58 U7.1 U10.58 | length 98
  Top Layer w0.25: 20.285,80.515 20.908,79.892 20.908,75.442 21.4,74.95 ; 23.75,74.95 36.7,74.95 43.25,68.4 43.25,54.4 44,53.65 44,51.5 43.3,50.8 v2(43.3,45.35) ; v2(24.85,65.6) 25.6,65.6 26.9,64.3 U10.58
  Top Layer w0.3: C20.1 19.97,80.2 20.285,80.515 20.285,87.545 22.94,90.2 25.75,90.2 26.951,88.999 U7.1 ; 21.4,74.95 23.75,74.95 ; 22.85,74.95 24.85,72.95 v2(24.85,67.8) ; U3.19 42,44.45 v2(42.2,44.25)
  Bottom Layer w0.3: J4.3 22.79,90.05 R6.1 ; v2(24.85,65.6) v2(24.85,67.8) ; v2(42.2,44.25) v2@43.35,45.4
ADC0: U6.59
ADC1: U6.60
ADC2: U6.61
ADC4: C30.2 R25.2 U6.3 | length 6
  Top Layer w0.25: R25.2 11.55,74.15 12.805,72.895 U6.3
  Top Layer w0.3: R25.2 C30.2
ADC5: C29.2 R24.1 U6.4 | length 5.7
  Top Layer w0.25: R24.1 12.6,71.8 13.195,72.395 U6.4
  Top Layer w0.3: R24.1 C29.2@11.35,72.997
ADC6: C32.2 R26.1 R43.1 U6.5 | length 7.2
  Top Layer w0.3: C32.2 11.347,68.203 R43.1 ; C32.2@11.35,69.403 R26.1 12.1,70.6 13.395,71.895 U6.5
ADC7: C33.2 R27.1 U6.6 | length 8.9
  Top Layer w0.3: R27.1 11.347,65.803 C33.2 12.05,67 12.85,67.8 12.85,70.643 13.602,71.395 U6.6
AGND: U6.11
AREF: U6.10
AUXSIGNAL: R35.2 U10.98 | length 2.4
  Top Layer w0.3: R35.2 U10.98
CAN_3V3: C1.2 C3.2 C7.2 U1.8 U2.3 U4.1 U4.2 | length 29.6
  Top Layer w0.3: C3.2 45.665,32.338 U2.3
  Top Layer w0.5: U2.3 45.665,28.185 46.7,27.15 49.75,27.15 ; v2(48.2,36.75) 48.205,36.745 48.205,33.995 49.75,32.45 49.75,27.15 ; C7.2 50.9,26 49.75,27.15
  Bottom Layer w0.5: C1.2@47.097,36.75 v2(48.2,36.75)
CAN_5V: C8.1 D1.K F1.2 U4.5 U4.7 U4.8 | length 10.3
  Top Layer w0.5: F1.2 47.53,10.635 47.53,11.73 48.1,12.3 49.45,12.3 50.085,11.665 U4.7 U4.8
CAN_CS: R1.1 U3.18 U6.44 | length 48.9
  Top Layer w0.25: U6.44 37.155,71.895 41.45,67.6 41.45,53.65 37.95,50.15 37.95,46.3 39.15,45.1 42.55,45.1 43.6,44.05 43.6,41.75 42.8,40.95 R1.1
CAN_GND: C1.1 C3.1 C7.1 C8.2 D1.A J1.4 J2.4 U1.5 U2.2 U4.4 | length 7.9
  Top Layer w0.3: U1.5 U1.5@44.395,36.195 ; U2.2 46.935,32.335 C3.1
  Top Layer w0.5: U1.5 44.395,36.795 v2(44.4,36.79) ; U2.2 46.935,28.815 v2(47.5,28.25)
  Bottom Layer w0.5: v2@44.41,36.8 C1.1
CAN_H: J1.3 J2.3 U2.7 | length 44.8
  Top Layer w0.3: J1.3 34.8,12 33.45,13.35 33.45,17.493 38.357,22.4 46,22.4 46.935,23.335 U2.7
  Bottom Layer w0.5: J2.3 21.5,11.75 24,11.75 25.55,10.2 25.55,9.5 26.95,8.1 33.1,8.1 J1.3
CAN_INT: U3.13 U6.16 | length 41.1
  Top Layer w0.25: U6.16 25.555,66.395 28.425,63.525 36.625,63.525 41,59.15 41,55.35 v2(40.5,54.85) ; v2(39.3,48.7) 39.65,48.35 U3.13
  Bottom Layer w0.25: v2(39.3,48.7) 39.3,53.65 v2(40.5,54.85)
CAN_L: J1.2 J2.2 U2.6 | length 43.3
  Top Layer w0.3: J1.2 31.3,11.95 32.7,13.35 32.7,17.45 38.15,22.9 44.8,22.9 45.665,23.765 U2.6
  Top Layer w0.5: J2.2 19.05,12.8 28.3,12.8 29.724,11.376 ; 29.55,11.55 29.724,11.376 ; J1.2 29.724,11.376
CAN_VCC: F1.1 J1.1 J2.1 | length 36
  Top Layer w1: J1.1 33.335,4.265 F1.1
  Bottom Layer w1: J2.1 15.7,12.95 24.65,12.95 J1.1
CLK: U9.6 U10.14 | length 2.1
  Top Layer w0.25: U9.6 24.89,44.54 U10.14
DIODESIGNAL: R32.2 U10.89 | length 2.4
  Top Layer w0.3: R32.2 U10.89
F\S\: U6.21 U10.72 | length 3
  Top Layer w0.2: U10.72@19.908,61.058 U6.21
FPGA_CS: U6.32 U10.61 | length 3
  Top Layer w0.2: U10.61@25.408,61.058 U6.32
FPGA_ENABLE: U6.25 U10.68 | length 3
  Top Layer w0.2: U10.68@21.908,61.058 U6.25
FPGA_RESET: R44.1 U6.23 U10.70 | length 5.4
  Top Layer w0.2: U10.70@20.908,61.058 v1(20.908,65.092)
  Bottom Layer w0.3: R44.1 20.5,65.5 v1(20.908,65.092)
FS_RESET: U6.22 U10.71 | length 3
  Top Layer w0.2: U10.71@20.408,61.058 U6.22
GND: *1.2 *1.10 C2.1 C4.2 C5.1 C6.1 C9.2 C10.2 C12.2 C13.2 C14.2 C15.2 C16.2 C17.2 C18.2 C19.2 C20.2 C21.2 C22.2 C23.2 C24.2 C25.2 C26.2 C27.2 C28.1 C29.1 C30.1 C31.2 C32.1 C33.1 C34.2 C35.2 C36.2 C37.2 C38.2 C39.2 C40.2 C41.2 C42.2 C43.2 C44.2 C45.2 C46.2 C47.2 C48.2 C49.2 C50.2 C51.2 D2.A J3.40 J3.41 J3.42 J3.43 J3.44 J3.45 J4.8 R5.1 R11.1 R12.1 R14.1 R15.1 R16.1 R17.1 R18.1 R30.1 R40.1 R42.1 R43.2 R44.2 R47.1 U1.4 U3.10 U5.4 U6.62 U6.63 U7.2 U8.2 U9.2 U10.10 U10.11 U10.32 U10.37 U10.46 U10.60 U10.65 U10.79 U10.90 U10.93 U11.2 U12.2 | length 83.4
  Top Layer w0.25: v1@6.1,76.55 R11.1 ; v1(10.95,87.85) C23.2 ; U6.63 18.408,75.742 18.85,75.3 v2(18.85,75.2) ; v2(21.503,41.547) U9.2
  Top Layer w0.3: U12.2 v1(4.953,85.547) 4.953,86.403 5.103,86.553 C49.2 C49.2@4.95,87.747 ; C51.2 7.903,83.25 C50.2 ; R47.1 C51.2@5.5,83.247 ; v1(8.85,67) C33.1 ; C24.2 10.797,83.203 v1(10.8,83.2) C31.2@11.903,83.2 ; R40.1@9.7,93.95 10.947,93.95 10.95,93.947 v1(10.95,92.9) ; C32.1 R43.2 ; C47.2 v1@10.953,92.897 ; U8.2@11,85.55 v1(11.953,85.55) v1@12.003,85.553 ; C23.2@12.003,87.8 C23.2 ; C31.2@12.153,83.2 C31.2 ; v1@13.297,94.4 U11.2 ; U10.93 17.9,50.3 v2(18.3,50.7) ; U10.90 v2(18.3,51.8) ; U10.79 17.8,57.3 v2(18.2,57.7) ; v1(17.8,82.8) C20.2@17.803,81.6 ; v2(18.85,75.2) 18.908,75.258 U6.62 ; v2(23.203,58.997) 23.4,59.194 U10.65 ; v2(25.55,58.95) 25.9,59.3 U10.60 ; v2(30.45,57.35) 31,56.8 U10.46 ; v2(30.6,50.2) 31,49.8 U10.32 ; v2(30.6,52.3) U10.37 ; C4.2 v2(42.147,43.253) ; U1.4@44.4,39.7 U1.4@44.4,40.545 ; v2(45.8,49.65) U3.10
  Top Layer w0.4: C46.2 v1(15.6,95.45) ; U7.2 30.799,88.001 v1(30.8,88.002)
  Top Layer w0.5: v1@8.75,69.4 C32.1 ; v1(8.85,73) C29.1 ; v1(8.85,75.35) C30.1 C28.1 ; R42.1@12.203,82.047 C31.2 ; v2(14.056,32.169) U5.4 ; R12.1 v2(21.45,24.4) ; R17.1 v2(24.3,24.35) ; R18.1 v2(27.15,24.35) ; U7.2 32.196,88.999 C19.2 ; v2(44.395,39.055) U1.4
  Bottom Layer w0.25: v1(17.35,65.5) R44.2
  Bottom Layer w0.3: C16.2 18.85,75.953 v2(18.85,75.2) 19.2,74.85 C13.2
  Bottom Layer w0.5: v2(14.056,32.169) v2@14.306,32.169 ; C9.2 R5.1@14.306,33.019 ; v1@14.45,76.55 15.15,77.25 18.45,77.25 19.097,76.603 C16.2 ; C40.2 17.297,50.7 v2(18.3,50.7) ; C41.2 18.147,51.953 v2(18.3,51.8) v2@18.25,51.75 ; C42.2 17.253,57.7 v2(18.2,57.7) ; C45.2 C39.2 ; v2(23.203,58.997) C43.2 ; v2(25.55,58.95) 25.803,59.203 C44.2 ; v2(30.45,57.35) 31.447,57.35 C37.2 ; v2(30.6,50.2) 31.503,50.2 C38.2 ; v2(30.6,52.3) 30.797,52.103 C36.2 ; v2@44.4,39.05 C2.1
  Bottom Layer w1: 12.5,71.55 14.8,71.55
  other v1: 9.7,16.2 10.6,16.2 11.45,16.2 12.4,16.2 13.3,16.2 14.2,16.2 15.05,16.2 15.9,16.2 16.8,16.2 23.15,46.5 8.85,69.4 14.5,76.5 6.1,76.6 6.65,83.25 13.3,94.4
GPIO1: U6.18 U10.75 | length 3
  Top Layer w0.2: U10.75@18.408,61.058 U6.18
GPIO2: U6.19 U10.74 | length 3
  Top Layer w0.2: U10.74@18.908,61.058 U6.19
GPIO3: U6.20 U10.73 | length 3
  Top Layer w0.2: U10.73@19.408,61.058 U6.20
IIN_MEAS_RAW: J3.3 R26.2 R46.2 | length 17.9
  Top Layer w0.3: R46.2 5.497,80.097 4.4,79 4.4,75.15 3.45,74.2 3.45,71.802 5.902,69.35 7.55,69.35 8.8,70.6 R26.2
MAINSIGNAL: R34.2 U10.95 | length 2.4
  Top Layer w0.3: R34.2 U10.95
N15VREGFAULT: R38.1 U10.86 U11.1 | length 69.5
  Top Layer w0.3: v1(6.5,92.25) 6.5,95.75 7.5,96.75 13.85,96.75 14.25,96.35 U11.1 ; v1(8.15,90.6) 6.85,89.3 4.357,89.3 2.25,87.193 2.1,87.043 2.1,76.85 1.577,76.327 1.577,56.45 3.927,54.1 9.95,54.1 10.4,54.55 13.05,54.55 R38.1 U10.86
  Bottom Layer w0.3: v1(6.5,92.25) v1(8.15,90.6)
NCURRENTFAULT: R45.1 U10.81 U12.1 | length 42.4
  Top Layer w0.3: U12.1 3.45,86.5 3.1,86.15 3.1,76.25 2.577,75.727 2.577,60.323 3.7,59.2 9.35,59.2 10.7,57.85 12.8,57.85 R45.1@13.75,56.9 ; R45.1 14.4,56.3 U10.81
Net*1_1: *1.1 R30.2 U10.24 | length 11.2
  Top Layer w0.25: U10.24 29.9,39.586 30.486,39 *1.1
  Bottom Layer w0.5: *1.1 R30.2@34.15,40.753
Net*1_3: *1.3 U10.25 | length 12.2
  Top Layer w0.25: U10.25 30.4,42.15 31.8,40.75 34.45,40.75 35.4,39.8 35.4,37.71 *1.3
Net*1_5: *1.5 R31.1 U10.22 | length 14.5
  Top Layer w0.25: U10.22 28.9,39.17 *1.5
  Bottom Layer w0.5: R31.1 *1.5@34.12,33.95
Net*1_9: *1.9 R29.1 U10.23 | length 21
  Top Layer w0.25: U10.23 29.4,39.45 33.6,35.25 34.6,35.25 35.4,34.45 35.4,30.09 *1.9
  Bottom Layer w0.5: R29.1 *1.9@34.14,28.85
NetC5_2: C5.2 U3.8 Y1.1 | length 5.8
  Top Layer w0.25: U3.8 48.135,48.35 Y1.1
  Bottom Layer w0.5: C5.2@48.718,46.135 Y1.1
NetC6_2: C6.2 U3.9 Y1.2 | length 5.7
  Top Layer w0.25: U3.9 48.335,49 Y1.2
  Bottom Layer w0.5: C6.2 Y1.2@50.332,50.997
NetC11_2: C11.2 R4.2 U5.6 | length 3.4
  Top Layer w0.25: C11.2 14.056,27.419 14.706,28.069 U5.6
  Top Layer w0.5: R4.2 C11.2
NetC13_1: C13.1 C16.1 R36.1 U6.64 | length 5
  Top Layer w0.3: v2(17.95,75.2) 17.908,75.242 17.908,76.858 R36.1
  Bottom Layer w0.3: C13.1 17.6,74.85 v2(17.95,75.2) 17.95,75.95 C16.1
NetC31_1: C31.1 R41.2 R42.2 U8.4 | length 3.7
  Top Layer w0.3: U8.4 13.59,83.904 13.597,83.897 R41.2
NetC34_1: C34.1 R28.2 U9.3 Y4.2 | length 6.4
  Top Layer w0.25: U9.3@22.303,40.587 22.303,38.747 23.285,37.765 Y4.2
  Bottom Layer w0.5: Y4.2 C34.1@23.285,37.815
NetC35_1: C35.1 R23.1 Y4.1 | length 5.5
  Top Layer w0.25: R23.1 28.165,37.735 Y4.1
  Bottom Layer w0.5: Y4.1 C35.1@28.165,37.885
NetC48_1: C48.1 R39.1 R40.2 U11.3 | length 3.8
  Top Layer w0.3: R39.1 U11.3
NetC51_1: C51.1 R46.1 R47.2 U12.3 | length 3.7
  Top Layer w0.3: R46.1 U12.3
NetD2_K: D2.K L1.1 U5.5
NetD3_K: D3.K R12.2 | length 2.3
  Top Layer w0.5: D3.K R12.2
NetD4_K: D4.K R17.2 | length 2.3
  Top Layer w0.5: D4.K R17.2
NetD5_K: D5.K R18.2 | length 2.3
  Top Layer w0.5: D5.K R18.2
NetD6_K: D6.K R19.2 | length 2.4
  Top Layer w0.25: D6.K 31.15,67.95 31.797,67.303 R19.2
NetD7_K: D7.K R20.2 | length 2.4
  Top Layer w0.25: D7.K 34.15,68.05 34.847,67.353 R20.2
NetD8_K: D8.K R21.2 | length 2.5
  Top Layer w0.3: R21.2 35.15,52.9 35.8,53.55 D8.K
NetD9_K: D9.K R22.2 | length 3.9
  Top Layer w0.3: R22.2 36.75,52.95 37.25,53.45 38.65,53.45 38.85,53.65 D9.K
NetJ3_1: J3.1 R24.2 | length 5.9
  Top Layer w0.3: J3.1 5.992,71.8 R24.2
NetJ3_2: J3.2 R25.1 R41.1 | length 17
  Top Layer w0.3: R25.1 8.178,74.15 J3.2 5.25,75.082 5.25,78.5 6,79.25 10.35,79.25 R41.1@11.95,80.85
NetJ3_8: J3.8 R13.1 R27.2 | length 4.1
  Top Layer w0.3: J3.8 8.682,65.532 8.95,65.8 R27.2 9.95,65.797 R13.1
NetJ3_18: J3.18 R14.2 R32.1 | length 6.7
  Top Layer w0.3: J3.18 8.168,52.832 8.7,52.3 R32.1
  Bottom Layer w0.3: v1(11.15,52.3) R14.2
NetJ3_19: J3.19 R8.1 R33.1 | length 9.8
  Top Layer w0.3: J3.19 5.898,51.55 7.95,51.55 8.7,50.8 R33.1
  Bottom Layer w0.3: v1(11.15,50.8) R8.1
NetJ3_21: J3.21 R15.2 R34.1 | length 9.6
  Top Layer w0.3: J3.21 5.888,49 9.75,49 10.05,49.3 R34.1
  Bottom Layer w0.3: v1(11.2,49.3) R15.2
NetJ3_22: J3.22 R16.2 R35.1 | length 6.4
  Top Layer w0.2: J3.22 J3.22@7.228,47.8
  Top Layer w0.3: J3.22@7.228,47.8 R35.1
  Bottom Layer w0.3: v1(11.2,47.8) R16.2
NetR2_1: R2.1 U5.8 | length 1.8
  Top Layer w0.25: U5.8 16.006,28.125 16.556,27.575 R2.1
NetR3_2: R3.2 R5.2 U5.3 | length 3.7
  Top Layer w0.25: U5.3 14.706,34.419 v2(15.006,34.719)
  Bottom Layer w0.5: R5.2 15.056,34.216 ; v2(15.006,34.719) 15.056,34.216 ; R3.2 15.056,34.216
NetR9_1: R9.1 R10.2 R11.2 | length 2.4
  Top Layer w0.3: R11.2 8.747,77.747 R9.1 R10.2
NetR21_1: R21.1 U10.30 | length 4.3
  Top Layer w0.3: U10.30 34.85,48.8 35.15,49.1 R21.1
NetR22_1: R22.1 U10.29 | length 6
  Top Layer w0.3: U10.29 35.8,48.3 36.75,49.25 R22.1
NetR23_2: R23.2 R28.1 U9.4 | length 2.8
  Top Layer w0.25: R28.1 R23.2 25.153,39.947 24.89,40.21 U9.4
NetU1_2: U1.2 U3.1 | length 4.5
  Top Layer w0.25: U1.2 46.935,42.265 46.115,43.085 46.115,43.615 46.3,43.8 U3.1
NetU1_3: U1.3 U3.2 | length 4.9
  Top Layer w0.25: U1.3 45.665,44.115 45.95,44.4 U3.2@46.85,44.4
NetU1_6: U1.6 U2.4 | length 5.4
  Top Layer w0.3: U2.4 44.395,32.695 45.665,33.965 U1.6
NetU1_7: U1.7 U2.1 | length 5.4
  Top Layer w0.3: U1.7 46.935,34.115 48.205,32.845 U2.1
NetU10_1: U10.1
NetU10_2: U10.2
NetU10_69: U10.69
NVOLTFAULT: R7.1 U8.1 U10.83 | length 54.3
  Top Layer w0.3: v1(7.95,88.8) 4.564,88.8 2.85,87.086 2.6,86.836 2.6,76.5 2.077,75.977 2.077,58.173 3.6,56.65 9.45,56.65 10,56.1 13,56.1 R7.1@13.75,55.35 ; v1(9.65,87.1) 10.249,86.501 U8.1 ; R7.1 13.85,55.3 U10.83
  Bottom Layer w0.3: v1(7.95,88.8) v1(9.65,87.1)
P1.0: U6.12
P1.1: U6.13
P1.2: U6.14
P1.3: U6.15
P1.5: U6.17
P2.4: U6.24
P2.6: U6.26
P2.7: U6.27
P3.0: U6.28 U10.67 | length 3.7
  Top Layer w0.2: U10.67 22.4,62.85 22.8,63.25 23.25,63.25 23.408,63.408 U6.28
P3.1: U6.29 U10.66 | length 3.7
  Top Layer w0.2: U10.66 22.9,62.7 23.05,62.85 23.5,62.85 23.908,63.258 U6.29
P3.2: U6.30 U10.64 | length 3.3
  Top Layer w0.2: U10.64 23.9,62.65 24.408,63.158 U6.30
P3.3: U6.31 U10.62 | length 3
  Top Layer w0.2: U10.62@24.908,61.058 U6.31
P3.5: R20.1 U6.33 | length 6.2
  Top Layer w0.25: U6.33 29.005,66.395 29.35,66.05 32.65,66.05 R20.1
P3.6: R19.1 U6.34 | length 2.7
  Top Layer w0.25: U6.34 R19.1@30.395,66.895
P3.7: U6.35
P4.0: U6.36
P4.1: U6.37
P4.2: U6.38
P4.3: U6.39
P4.4: U6.40
P4.5: U6.41
P4.6: U6.42
P4.7: U6.43
P5.1: U3.16 U6.45 | length 38.5
  Top Layer w0.25: U6.45 37.305,72.395 41.9,67.8 41.9,46.65 41.65,46.4 U3.16
P5.2: U3.17 U6.46 | length 40.2
  Top Layer w0.25: U6.46 37.455,72.895 42.35,68 42.35,46.4 41.7,45.75 U3.17
P5.3: U3.14 U6.47 | length 43.1
  Top Layer w0.25: U6.47 37.605,73.395 42.8,68.2 42.8,52.85 v2(43.3,52.35) ; v2(40.2,51.4) 39.215,50.415 38.4,49.6 38.4,48.55 39.25,47.7 U3.14
  Bottom Layer w0.25: v2@40.15,51.4 42.35,51.4 v2(43.3,52.35)
P5.4: U6.48
P5.5: U6.49
P5.6: U6.50
P5.7: U6.51
SHUTDOWN: R33.2 U10.92 | length 2.4
  Top Layer w0.3: R33.2 U10.92
TCK: J4.7 U6.57 | length 8.8
  Top Layer w0.25: U6.57 21.408,77.758 22.95,79.3 22.95,82.53 J4.7
TDI: J4.5 U6.55 | length 17.5
  Top Layer w0.25: J4.5 22.88,87.6 24.8,87.6 26.1,86.3 26.1,80.569 25.35,79.819 24.769,79.819 22.408,77.458 U6.55
TDO: J4.4 U6.54 | length 16.2
  Top Layer w0.25: U6.54 22.908,77.321 24.556,78.97 24.936,79.35 26.114,79.35 ; J4.4 26.604,86.496 26.604,80.404 25.55,79.35
TMS: J4.6 U6.56 | length 12.7
  Top Layer w0.25: U6.56 21.908,77.608 24.594,80.294 25.144,80.294 25.65,80.8 25.65,84.91 J4.6
VREF: C15.1 C18.1 C24.1 C47.1 C50.1 U6.7 U8.3 U11.4 U12.4 | length 39.2
  Top Layer w0.2: U8.3 12.291,84.591 12.95,85.25 14.05,85.25 15.2,84.1 15.2,80.15 14.35,79.3 13.35,79.3 12.7,78.65 v1(12.7,77.7) ; U6.7 16.205,70.895 v2(16.7,70.4)
  Top Layer w0.25: C47.1 U11.4@12.35,92.75
  Top Layer w0.3: U12.4 C50.1@7.94,84.59 ; C50.1 C24.1 ; 8.85,84.6 8.85,87.7 9.823,88.673 10.923,88.673 12.35,90.1 C47.1 ; C24.1@9.7,84.35 9.941,84.591 U8.3
  Bottom Layer w0.3: v1(12.7,77.7) 12.7,74.6 14.55,72.75 C15.1
  Bottom Layer w0.5: v2(16.7,70.4) 16.7,72.7 C15.1
XT1IN: U6.8 Y2.1 | length 1.7
  Top Layer w0.2: Y2.1 14.445,70.395 U6.8
XT1OUT: U6.9 Y2.2 | length 1.9
  Top Layer w0.2: Y2.2 15.045,69.895 U6.9
XT2IN: C22.1 U6.53 Y3.1 | length 13.4
  Top Layer w0.25: U6.53 23.408,77.185 24.786,78.563 25.123,78.9 26.3,78.9 29.9,82.5 Y3.1
  Bottom Layer w0.3: Y3.1 C22.1@31.565,84.515
XT2OUT: C21.1 U6.52 Y3.2 | length 9.6
  Top Layer w0.25: U6.52 23.908,77.049 25.309,78.45 28.715,78.45 Y3.2
  Bottom Layer w0.3: Y3.2 C21.1@31.585,79.635
pads on no net: *1.7 *1.8 J3.4 J3.5 J3.6 J3.7 J3.9 J3.10 J3.11 J3.12 J3.13 J3.14 J3.15 J3.16 J3.17 J3.20 J3.23 J3.24 J3.25 J3.28 J3.29 J3.30 J3.31 J3.32 J3.33 J3.34 J3.35 J3.47 J3.48 J3.49 J3.50 J4.1 J4.9 J4.10 U2.5 U2.8 U3.3 U3.4 U3.5 U3.6 U3.7 U3.11 U3.12 U3.15 U4.3 U4.6 U9.1 U10.3 U10.4 U10.5 U10.6 U10.7 U10.8 U10.12 U10.15 U10.16 U10.17 U10.18 U10.19 U10.20 U10.21 U10.26 U10.27 U10.28 U10.33 U10.34 U10.35 U10.36 U10.38 U10.40 U10.41 U10.42 U10.43 U10.44 U10.47 U10.48 U10.49 U10.50 U10.51 U10.52 U10.53 U10.54 U10.55 U10.56 U10.57 U10.76 U10.77 U10.78 U10.82 U10.84 U10.85 U10.87 U10.91 U10.96 U10.97 U10.99

## Polygon pours and split planes (outlines as drawn)
no net on Top Layer (hatched 90Degree grid 0 track 0.2, remove dead copper): 12.1,48.642 25.2,48.642 25.2,61.45 12.212,61.45
3V3 on Top Layer (hatched 90Degree grid 0.2 track 0.4, remove dead copper): 16.3,60.9 16.3,44.7 32.45,44.7 32.45,60.9
GND on Bottom Layer (hatched 90Degree grid 0.15 track 0.2, remove dead copper): 17.55,98.3 17.55,85.55 15.55,83.55 15.55,79.25 13.5,77.2 13.3,77 13.3,62.5 0.6,62.5 0.6,91.2 5.25,91.2 5.25,98.75 17.55,98.75
GND on Bottom Layer (hatched 90Degree grid 0.15 track 0.2, remove dead copper): 0.6,14.85 26.65,14.85 28.939,17.139 28.9,20.9 35.05,27.05 39.3,27.05 39.3,38.15 52.9,38.15 52.9,91.2 47.1,91.2 47.1,98.7 18.1,98.7 18.1,85.25 16.05,83.2 16.05,78.95 13.95,76.85 13.95,61.8 0.6,61.8
CAN_GND on Bottom Layer (hatched 90Degree grid 0.2 track 0.25, remove dead copper): 9.65,1.35 47,1.35 47,8.65 53,8.65 53,37.25 41.7,37.25 41.7,24.25 36.55,24.25 31.15,18.85 31.15,15.55 30.4,14.8 28.25,12.65 9.6,12.65 9.6,1.35

## Keep-outs
Keep-Out Layer:
  lines w0.254: 6.096,1.27 47.117,1.27 ; 6.096,1.3 6.096,8.636 0.6,8.636 0.6,91.186 5.27,91.186 5.27,98.73 47.117,98.73 47.117,91.186 52.959,91.186 52.959,8.636 47.117,8.636 47.117,1.3

## Other copper
Top Layer:
  rectangle net GND: 13.15,75.85 16.35,77
  region net NetD2_K: 10.056,31.519 10.056,30.669 19.806,30.669 19.806,31.519
  region net NetD2_K: 10.056,31.169 10.056,28.169 14.306,28.169 14.306,31.169
  region net 5V: 14.906,26.469 14.906,22.119 16.956,22.119 16.956,26.469
  region net 5V: 14.906,27.769 14.906,26.319 15.856,26.319 15.856,27.769
  region net GND: 10.056,39.069 10.056,31.819 14.306,31.819 14.306,39.069
  region net 3V3: 16.556,38.969 16.556,32.119 19.856,32.119 19.856,38.969
  region net 3V3: 15.806,34.019 15.806,32.119 19.856,32.119 19.856,34.019
  region net GND: 8.706,39.069 8.706,22.019 9.806,22.019 9.806,39.069
  region net GND: 8.706,39.069 8.706,31.819 11.556,31.819 11.556,39.069
  rectangle net CAN_5V: 49.7,9.3 52.1,13.35
  rectangle net CAN_5V: 41.7,12 52.1,13.85
  rectangle net CAN_5V: 41.5,8 46.65,13.85
  rectangle net CAN_5V: 41.5,12 46.5,16
  rectangle net CAN_GND: 36.75,8 41.25,17.6
  rectangle net CAN_3V3: 49.7,14.7 51.85,19.05
  rectangle net CAN_GND: 36.75,17.2 48.8,19.1
  rectangle net CAN_GND: 40.25,16.3 46.8,18.45
  rectangle net CAN_GND: 46.8,14.55 48.15,18
  rectangle net CAN_5V: 46.4,9.1 48.05,12.4
  rectangle net GND: 9.2,13.75 17.3,16.65
  rectangle net 5V: 8.5,16.85 17.3,21.638
  rectangle net 5V: 14.85,16.85 16.95,25
  rectangle net GND: 22.75,43.05 23.55,46.95
  text "Designed:" at 43.45,97.35 h1.52 r270
  text "R. Reid" at 35.9,95.3 h1.52 r270
  text "A. Gotterba" at 38.25,95.2 h1.52 r270
  text "D.C.A. Snowdon" at 40.6,95.15 h1.52 r270

## Silkscreen, mask and mechanical layers (free items; w line width, h text height)
Top Overlay:
  text "Designed:" at 43.5,97.35 h1.52 r270
  text "R. Reid" at 35.95,95.3 h1.52 r270
  text "A. Gotterba" at 38.3,95.2 h1.52 r270
  text "D.C.A. Snowdon" at 40.65,95.15 h1.52 r270
Mechanical 3:
  lines w0.254: 0,3.55 ccw(c3.5,3.55) 3.5,0.05 49.7,0.05 ccw(c49.7,3.55) 53.2,3.55 53.2,96.5 ccw(c49.7,96.5) 49.7,100 3.5,100 ccw(c3.5,96.5) 0,96.5 0,3.55
Mechanical 4:
  drawing of 309 lines, arcs and shapes, not listed
  text "6.0" at -41.675,99.19 h1
  text "5.0" at -41.675,73.79 h1
  text "4.0" at -41.675,48.39 h1
  text "3.0" at -41.675,22.99 h1
  text "2.0" at -41.675,-2.41 h1
  text "PLACE" at 73.768,-26.159 h1
  text "1.0" at -41.04,-27.81 h1
  text "TITLE:" at 9.443,-29.398 h1
  text "ENGINEER:" at -13.1,-29.715 h1
  text "LOGO" at 73.768,-29.715 h1
  text "MiningTiming Control Testboard" at 10.453,-33.458 h1
  text "HERE" at 73.768,-33.779 h1
  text "PHONE:" at -13.1,-34.478 h1
  text "ENGINEER:" at -13.1,-39.367 h1
  text "PART NO.:" at 9.76,-41.463 h1
  text "REV:" at 53.893,-41.463 h1
  text "DATE:" at 65.64,-41.463 h1
  text "01" at 58.338,-43.368 h1
  text ".PRINT_DATE" at 71.355,-43.368 h1
  text "PHONE:" at -13.1,-44.003 h1
  text "FILE NAME:" at -13.1,-48.511 h1
  text "LAYER:" at 33.636,-48.511 h1
  text "GERBER:" at 79.864,-48.511 h1
  text ".PCB_FILE_NAME_NO_PATH" at -2.94,-50.035 h1
  text ".LAYER_NAME" at 39.732,-50.035 h1
  text "0" at -38.817,-53.21 h1
  text "Y" at -32.15,-55.433 h1 r270
  text "X" at -28.022,-60.83 h1
  text "0" at -24.53,-65.91 h1 r270
  text "1.0" at 0.87,-65.91 h1 r270
  text "2.0" at 26.27,-65.91 h1 r270
  text "3.0" at 51.67,-65.91 h1 r270
  text "4.0" at 77.07,-65.91 h1 r270
  text "5.0" at 102.47,-65.91 h1 r270
  text "6.0" at 127.87,-65.91 h1 r270
  text "7.0" at 153.27,-65.91 h1 r270

## Text inside footprints (layer, text, board x,y; h text height)
*1: Top Overlay "2" at 36.182,41.54 h1 r270; Top Overlay "1" at 33.642,41.032 h1 r270; Top Overlay "9" at 33.642,27.316 h1 r270; Top Overlay "10" at 36.182,27.316 h1 r270
J4: Top Overlay "2" at 23.682,93.99 h1 r270; Top Overlay "1" at 21.142,93.482 h1 r270; Top Overlay "9" at 21.142,79.766 h1 r270; Top Overlay "10" at 23.682,79.766 h1 r270